# Altium PCB 102711_C0.PcbDoc
Units mil, origin at the board's own origin, x right, y up, seen from the top; angles counter-clockwise.
Board outline 3500.99 x 3320.09 mil, 2 copper layers (Top Layer, Bottom Layer); 22 components, 28 nets, 89 pads, 31 vias.
Unrouted connection lines stored in the file: 12.
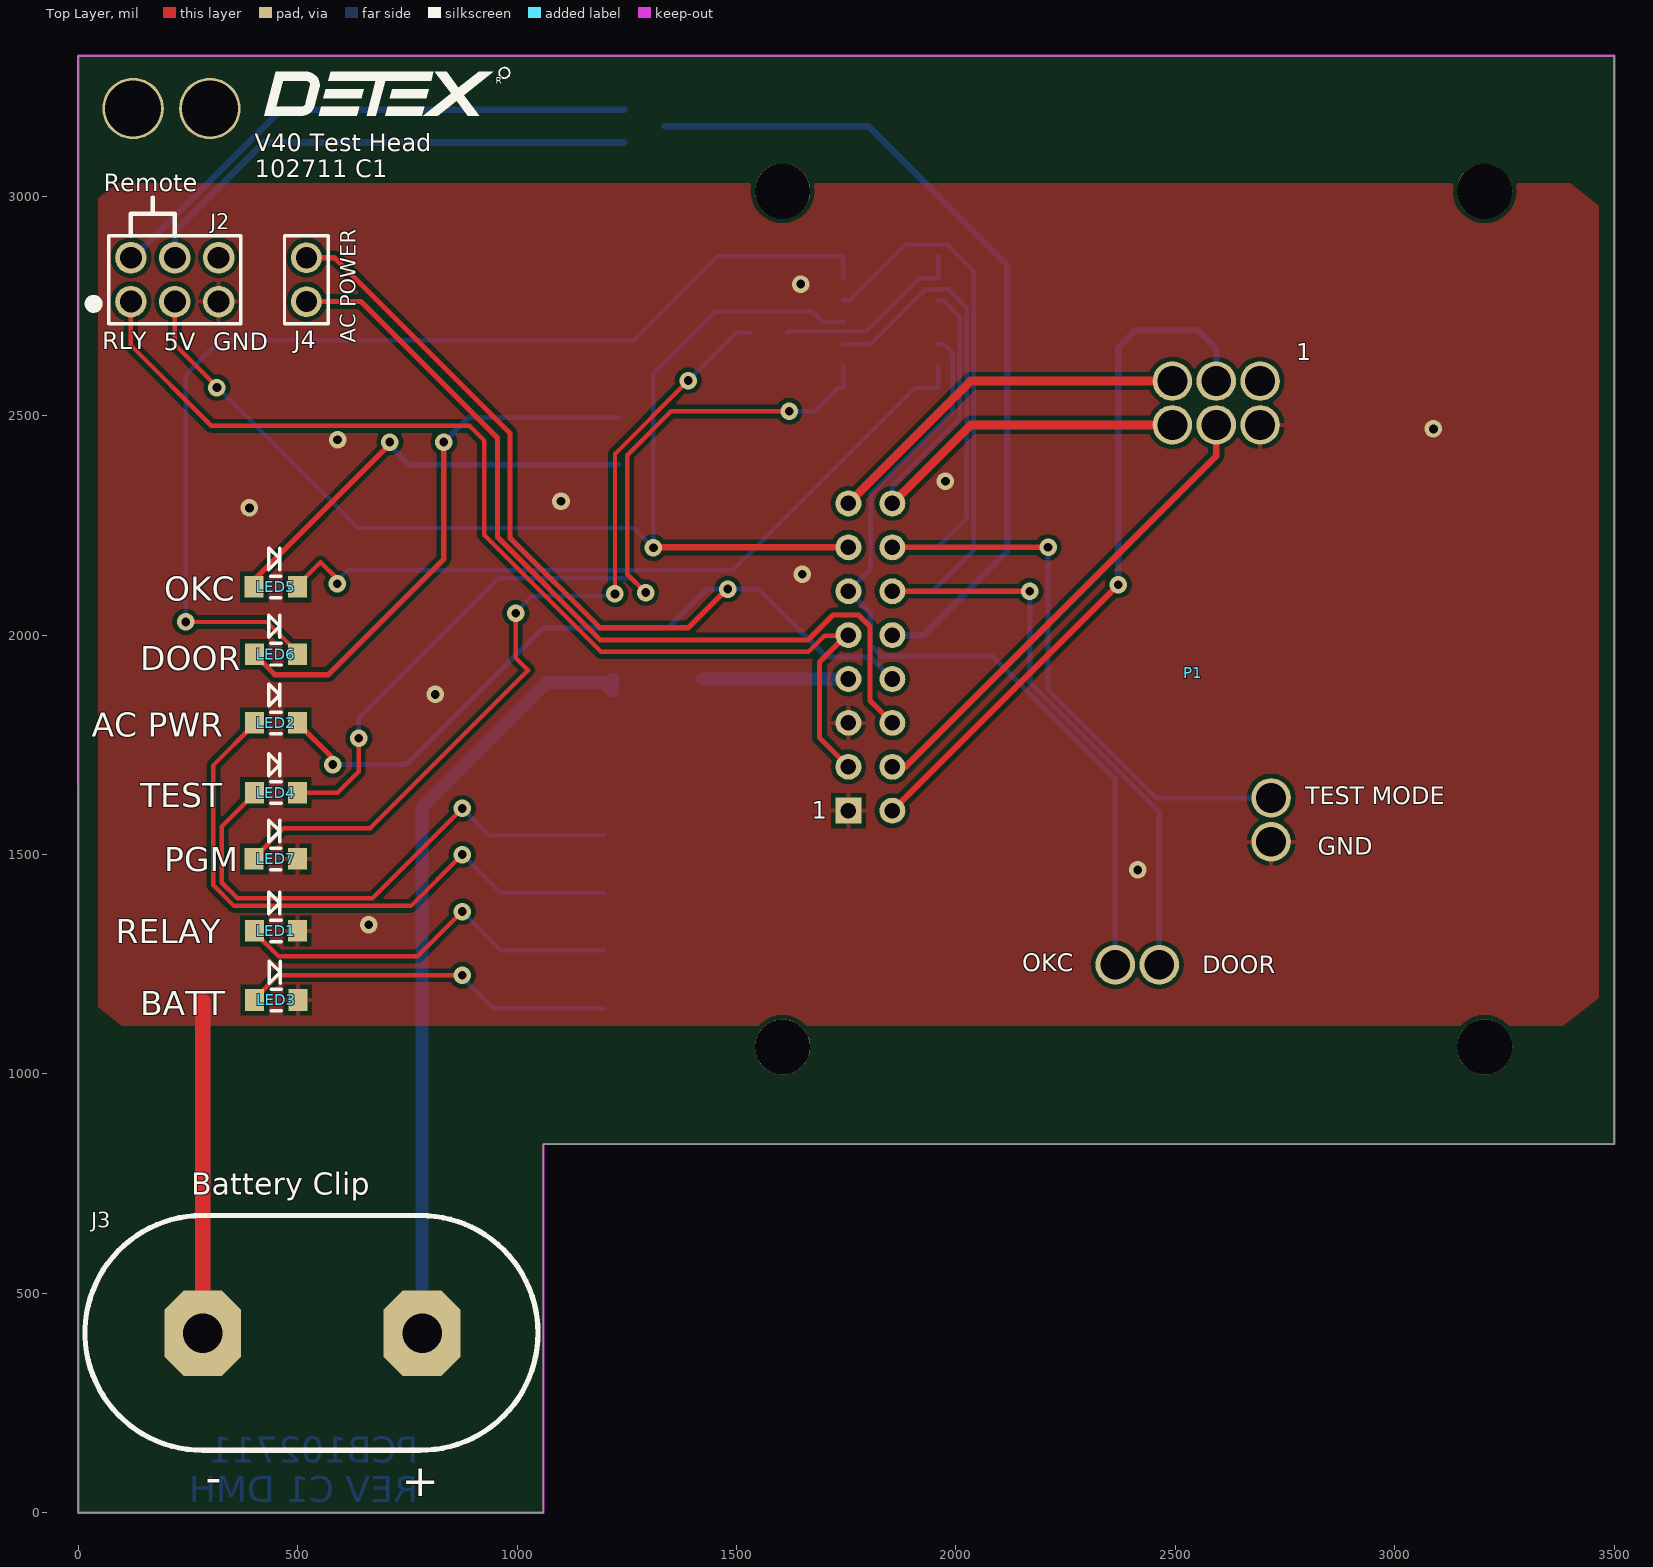
[diagram p0: Top Layer view]
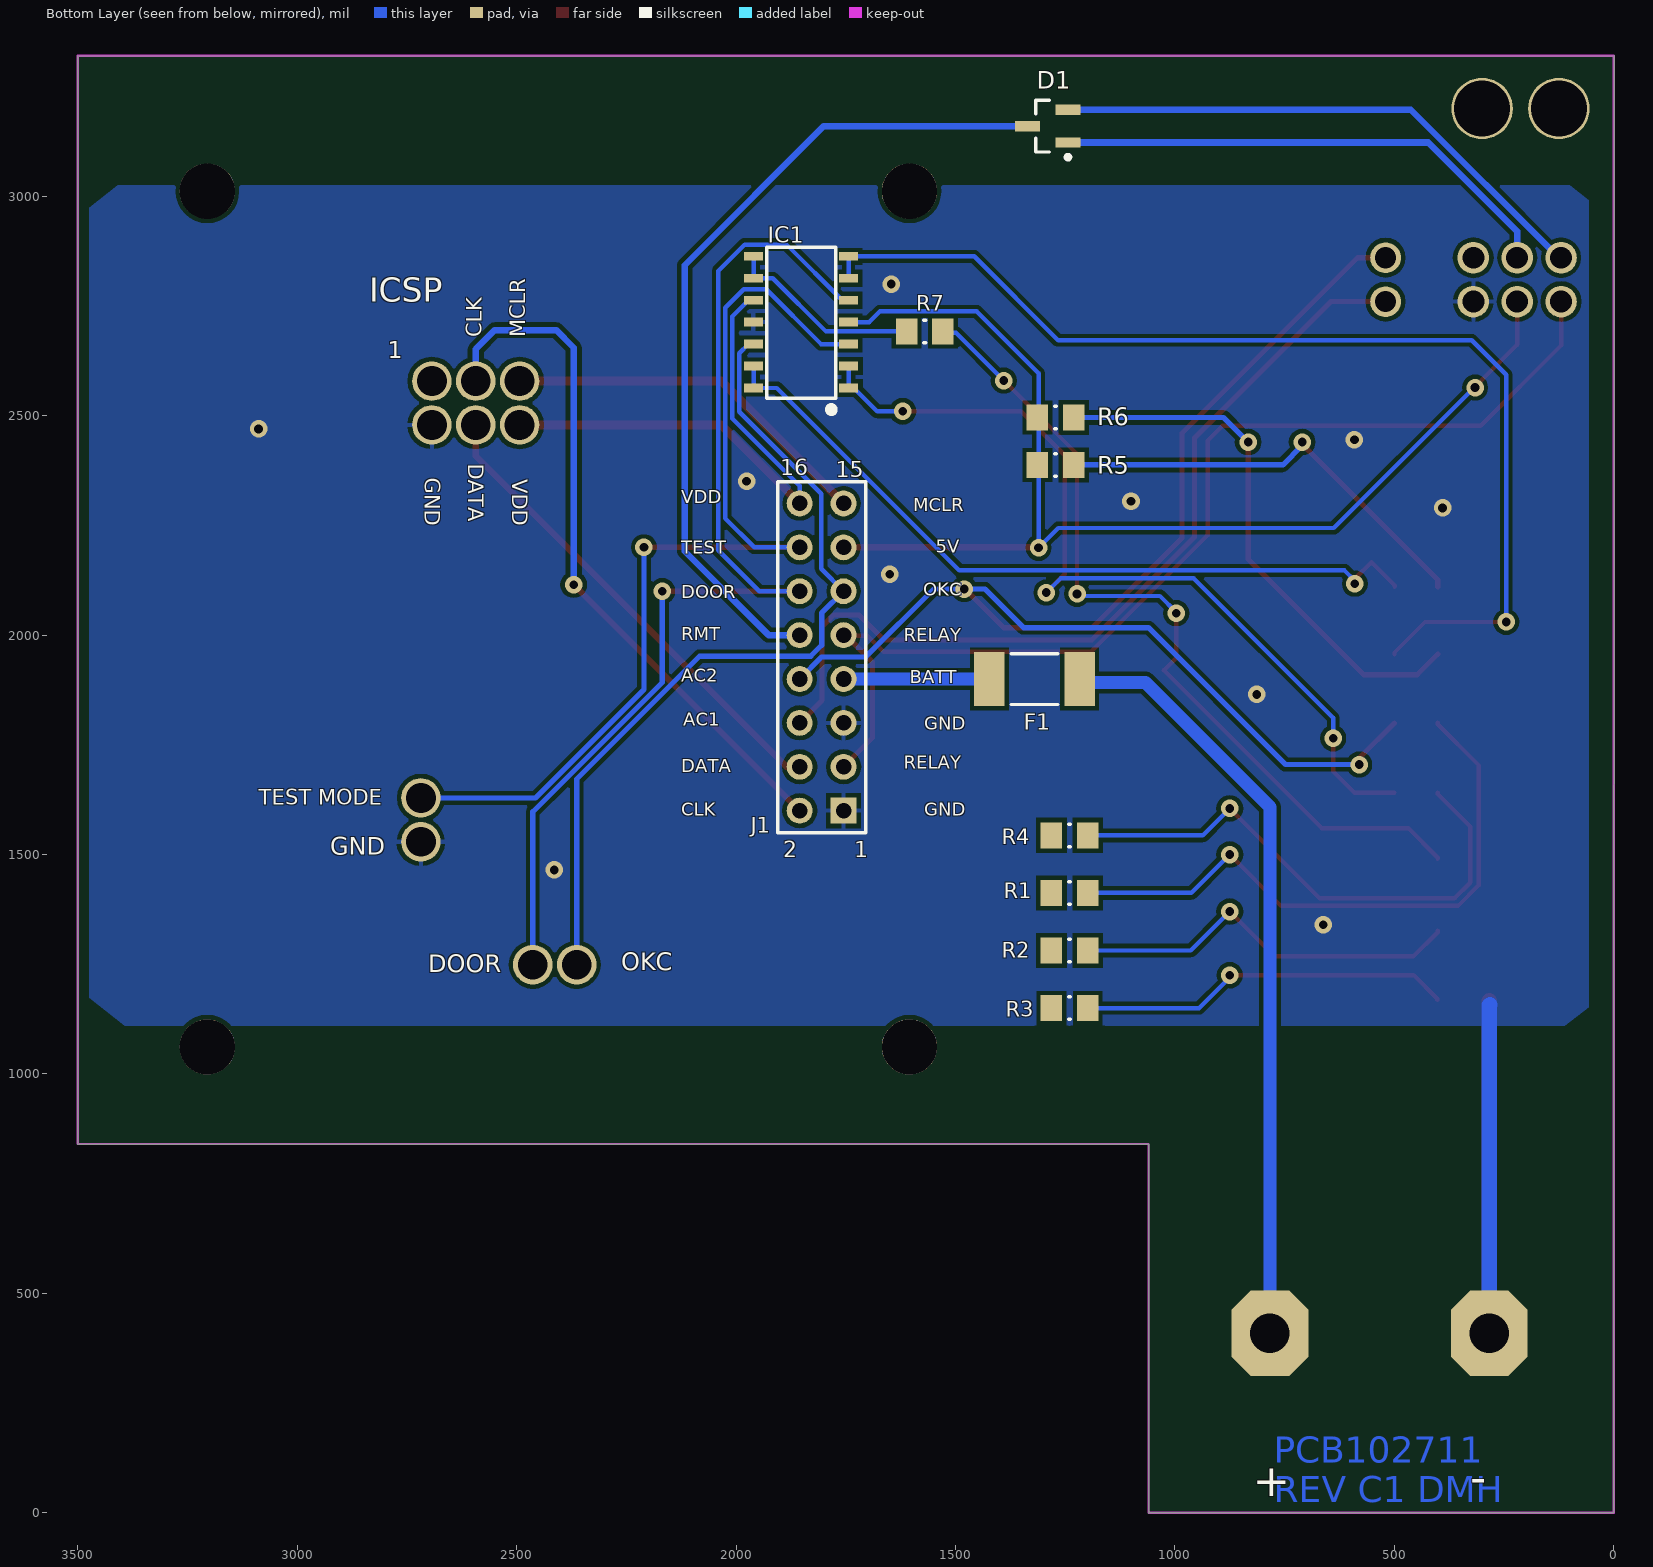
[diagram p1: Bottom Layer view, seen from below]

## Layer stack, top to bottom
Top Solder: solder mask 0.4, Solder Resist, Dk 3.5
Top Layer: signal copper 1.4
Dielectric1: dielectric 12.6, FR-4, Dk 4.8
Bottom Layer: signal copper 1.4
Bottom Solder: solder mask 0.4, Solder Resist, Dk 3.5

## Board outline
0,0 -0.99,3319.44 3500,3320.09 3500,840.16 1059.84,840.16 1059.84,0

## Design rules (kind name [scope] priority, off if disabled: settings)
Clearance Clearance_1 [InPolygon vs (InComponent('ICSP') OR InComponent('OKC_PAD') OR InComponent('TEST'))] p1: gap=20 ignorepadtopadclearanceinfootprint=FALSE except(0: Arc-Hole Track-Hole SMDPad-Hole THPad-Hole Via-Hole Fill-Hole Poly-Hole Region-Hole Text-Hole)
Clearance "Poly Clearance" [InPolygon vs (InComponent('J3') OR InComponent('J4') OR InComponent('J5') OR InComponent('J6') OR InComponent('OKC_PAD') OR InComponent('TEST') OR InComponent('ICSP'))] p2 off: gap=20 ignorepadtopadclearanceinfootprint=FALSE except(0: Arc-Hole Track-Hole SMDPad-Hole THPad-Hole Via-Hole Fill-Hole Poly-Hole Region-Hole Text-Hole)
Clearance "Poly Clearance_1" [InPolygon] p3: gap=10 ignorepadtopadclearanceinfootprint=FALSE except(0: Arc-Hole Track-Hole SMDPad-Hole THPad-Hole Via-Hole Fill-Hole Poly-Hole Region-Hole Text-Hole)
Clearance [All] p4: gap=7 ignorepadtopadclearanceinfootprint=FALSE
HoleSize [All] p1: absolutevalues=TRUE maxlimit=200 minlimit=15 maxpercent=80.000 minpercent=20.000
MinimumSolderMaskSliver [All] p1 off: minsoldermaskwidth=6
PlaneClearance PlaneClearance_1 [(InNet('GND') AND IsTrack OR IsPolygon)] p1: clearance=0
PlaneClearance [All] p2: clearance=20
PolygonConnect PolygonConnect_1 [IsVia vs InNet('GND')] p1: connectstyle=Direct reliefconductorwidth=8 reliefentries=2 polygonreliefangle="90 Angle" airgapwidth=10
PolygonConnect [All] p2: connectstyle=Relief reliefconductorwidth=10 reliefentries=4 polygonreliefangle="90 Angle" airgapwidth=10
RoutingVias [All] p1: holewidth=28 width=50 viastyle="Through Hole" minholewidth=15 minwidth=30 maxholewidth=35 maxwidth=50
SilkToSilkClearance [All] p1: silktosilkclearance=6
SilkToSolderMaskClearance SilkscreenOverComponentPads [IsPad] p1: minsilkscreentomaskgap=10 clearancetoexposedcopper=TRUE
SolderMaskExpansion [All] p1: expansion=4
Width [All] p1: maxlimit=60 minlimit=8 preferedwidth=10
25 further rules are at their usual default settings.

## Classes and differential pairs
component class 102711: D1 F1 IC1 J1 J2 J3 J4 LED1 LED2 LED3 LED4 LED5 LED6 LED7 P1 R1 R2 R3 R4 R7

## Components (designator, comment, footprint, x,y, rotation, side; value= is the part's Value field where it differs from the comment)
D1 "BAS70-05" SOT-23_M 1290,3160 r0 bottom
F1 "1812L050PR" LFUS-1812L050_V 1320,1900 r0 bottom
IC1 "LM324F-GE2" SOIC14 1743.46,2563.19 r90 bottom
J1 "2x8 Header" HDR2X8 1755,1600 r90 bottom
J2 "2x3 MOLEX" HDR2X3 120,2760 r0 top
J3 "DC POWER" BAT_CONN 783.47,409.45 r0 top locked
J4 "AC POWER" HDR1X2 520,2760 r90 top
LED1 "RELAY" LTST-C170YKT_V 450.47,1326.06 r0 top
LED2 "AC PWR" LTST-C170YKT_V 450.47,1800 r0 top
LED3 "BATT" LTST-C170YKT_V 451.18,1168.58 r0 top
LED4 "TEST" LTST-C170YKT_V 450.47,1641.02 r0 top
LED5 "OKC" LTST-C170YKT_V 450,2110 r0 top
LED6 "DOOR" LTST-C170YKT_V 450.47,1956.5 r0 top
LED7 "PGM" LTST-C170YKT_V 450,1490 r0 top
P1 "V40 POGOS" V40_POGOS 2693.19,2578.98 r0 top locked
R1 "Res1" RESC0805(2012)_M 1240,1412.5 r180 bottom value=3.3K
R2 "Res1" RESC0805(2012)_M 1240,1281.25 r180 bottom value=1K
R3 "Res1" RESC0805(2012)_M 1240,1150 r0 bottom value=1.5K
R4 "Res1" RESC0805(2012)_M 1240,1543.75 r180 bottom value=1K
R5 "Res1" RESC0805(2012)_M 1272,2388 r180 bottom value=1K
R6 "Res1" RESC0805(2012)_M 1272,2496 r0 bottom value=1K
R7 "Res1" RESC0805(2012)_M 1570,2692.15 r180 bottom value=1K

## Footprints (in the part's own frame and the unit in brackets; to place one, negate y for a bottom-side part, rotate by r counter-clockwise, add the part's x,y. Pads: shape width x height; smd on the part's side, far side on the other; paste and mask are expansions set on the pad)
BAT_CONN [mil]
  oct 175x195 hole 90: 1(0,0) 2(-500,0)
  silkscreen extent -768,-267 264,268
HDR1X2 [mil] "Connector; Header; 2 Position"
  round 70 hole 48: 1(0,0) 2(100,0)
  silkscreen extent -50,-50 150,50
HDR2X3 [mil] "Connector; Header; 3x2 Position"
  round 72 hole 50: 1(0,0) 2(0,100) 3(100,0) 4(100,100) 5(200,0) 6(200,100)
  silkscreen extent -50,-50 250,150
HDR2X8 [mm] "Connector; Header; 8x2 Position"
  rect 1.5x1.5 hole 0.9: 1(0,0)
  round 1.5 hole 0.9: 2(0,2.54) 3(2.54,0) 4(2.54,2.54) 5(5.08,0) 6(5.08,2.54) 7(7.62,0) 8(7.62,2.54) 9(10.16,0) 10(10.16,2.54) 11(12.7,0) 12(12.7,2.54) 13(15.24,0) 14(15.24,2.54) 15(17.78,0) 16(17.78,2.54)
  silkscreen extent -1.27,-1.27 19.05,3.81
LFUS-1812L050_V [mm] "Chip Fuse, 2-Leads, Body 4.73x3.41mm"
  rect 1.78x3.15 smd: 1(-2.615,0) 2(2.615,0)
  silkscreen extent -1.35,-1.47 1.35,1.48, body extent -2.36,-1.7 2.36,1.7, height 0.75
LTST-C170YKT_V [mm] "SMD, 2-Leads, Body 2x1.25mm"
  rect 1.1x1.25 smd: 1(-1.25,0) 2(1.25,0)
  silkscreen extent -0.41,-0.63 0.3,2.25, body extent -1,-0.63 1,0.63, height 1.1
RESC0805(2012)_M [mm] "Chip Resistor, Body 2.0x1.3mm, IPC Low Density"
  rect 1.25x1.5 smd: 1(-1.05,0) 2(1.05,0)
  silkscreen extent -0.05,-0.65 0.05,0.65, body extent -1.1,-0.67 1.1,0.67, height 0.7
SOIC14 [mm]
  rect 0.51x1.1 smd: 1(0,0) 2(1.27,0) 3(2.54,0) 4(3.81,0) 5(5.08,0) 6(6.35,0) 7(7.62,0) 8(7.62,5.5) 9(6.35,5.5) 10(5.08,5.5) 11(3.81,5.5) 12(2.54,5.5) 13(1.27,5.5) 14(0,5.5)
  silkscreen extent -1.3,0.75 8.15,4.75, body extent -0.5,-0.29 8.1,5.79, height 1.65
SOT-23_M [mm] "SOT23, 3-Leads, Body 2.9x1.3mm, Pitch 0.95mm, Lead Span 2.5mm, IPC Low Density"
  rect 1.45x0.6 smd: 1(-1.175,0.95) 2(-1.175,-0.95) 3(1.175,0)
  silkscreen extent -1.3,-1.5 0.7,1.92, body extent -0.7,-1.5 0.7,1.5, height 1.1
V40_POGOS [mil]
  round 90 hole 68: 1(0,0) 2(0,-100) 3(-100,0) 4(-100,-100) 5(-200,0) 6(-200,-100) 7(25,-950) 8(25,-1050) 9(-230,-1330) 10(-330,-1330)

## Part data
D1: library part "D Schottky", "Dual Schottky Diode", MFR="DIODES, INC", ComponentLink1Description=Datasheet, ComponentLink1URL=http://www.mouser.com/ds/2/115/ds11007-768590.pdf, IFmax=70mA, MFR P/N=BAS70-05, PackageReference=SOT23
F1: library part CMP-1700-00002-1, "POLY-FUSE(R) Resettable PTC, 0.5 A, 0.15 to 1 Ohm Resistance, -40 to 85 degC, 1812 (4532 Metric), RoHS, Tape and Reel", Case\Package=0603, Case Code (Metric)=1608, Max Operating Temperature="155 degC", Min Operating Temperature="-55 degC", Package Quantity=1, Power Rating="100 mW", Resistance="150 kohm", Tolerance=1%, Voltage Rating="50 V", Case Code (Imperial)=0603, ComponentLink1Description="Manufacturer URL", ComponentLink1URL=http://www.littelfuse.com/, ComponentLink2Description=Datasheet, ComponentLink2URL=http://www.littelfuse.com/~/media/electronics/datasheets/resettable_ptcs/littelfuse_ptc_1812l_datasheet.pdf.pdf, DatasheetVersion=Feb-16, Height="0.45 mm", Length="1.6 mm", Mount="Surface Mount", PackageDescription="2-Pin Surface Mount Device, Body 4.55 x 3.24 mm", PackageReference=1812, Packaging="Tape and Reel", Pins=2, REACH SVHC="No SVHC", RoHSCompliant=true, Voltage Rating (DC)="50 V", Width="0.8 mm"
IC1: library part LM324F-GE2_1, "Quad Operational Amplifier 3-32V", ComponentLink1Description=Datasheet, ComponentLink1URL=https://www.mouser.com/ds/2/348/m358f-e-1265268.pdf
J1: library part "2x9 Header", DESC="8x2 HEADER"
J2: library part "Header 3X2", "Header, 3-Pin, Dual row", LatestRevisionDate=17-Jul-2002, LatestRevisionNote="Re-released for DXP Platform.", Publisher="Altium Limited"
J3 J4: library part "Header 2", "Header, 2-Pin", LatestRevisionDate=17-Jul-2002, LatestRevisionNote="Re-released for DXP Platform.", Publisher="Altium Limited"
LED1: library part CMP-1674-00007-1, "LED Uni-Color Green, 100 mW, 5 V, -55 to 85 degC, 2-Pin SMD, RoHS, Tape and Reel", ComponentLink1Description="Manufacturer URL", ComponentLink1URL=http://www.us.liteon.com/, ComponentLink2Description=Datasheet, ComponentLink2URL=http://datasheet.octopart.com/LTST-C190GKT-Lite-On-datasheet-158530.pdf, DatasheetVersion=Dec-06, PackageDescription="2-Pin Surface Mount Device, Body 1.6 x 0.8 mm", PackageReference=C190GKT
LED2 LED3: library part LED-ORANGE-AK-2
LED4: library part CMP-1674-00003-5, "LED Uni-Color Yellow, 60 mW, 80 mA, -55 to 85 degC, 2-Pin SMD, RoHS, Tape and Reel", Colour=Yellow, Manufacturer=Lite-On, Max Operating Temperature="85 degC", Min Operating Temperature="-55 degC", Package Quantity=3000, ComponentLink1Description="Manufacturer URL", ComponentLink1URL=http://www.us.liteon.com/, ComponentLink2Description=Datasheet, ComponentLink2URL="http://media.digikey.com/pdf/Data Sheets/Lite-On PDFs/LTST-C170YKT.pdf", DatasheetVersion=03/2000, DESC=TEST, Height="1.1 mm", Length="2 mm", Mount="Surface Mount", Mounting Technology="Surface Mount", PackageDescription="2-Pin Surface Mount Device, Body 2 x 1.25 mm", PackageReference=C170YKT, Packaging="Tape and Reel", Pins=2, RoHSCompliant=true
LED5 LED6 LED7: library part CMP-1674-00001-5, "LED Uni-Color Red, 100 mW, 200 mA, -55 to 85 degC, 2-Pin SMD, RoHS, Tape and Reel", Colour=Red, Manufacturer=Lite-On, Max Operating Temperature="85 degC", Min Operating Temperature="-55 degC", Package Quantity=3000, ComponentLink1Description="Manufacturer URL", ComponentLink1URL=http://www.us.liteon.com/, ComponentLink2Description=Datasheet, ComponentLink2URL=http://media.digikey.com/pdf/Data%20Sheets/Lite-On%20PDFs/LTST-C170CKT.pdf, DatasheetVersion=03/2003, Height="1.1 mm", Length="2 mm", Mount="Surface Mount", Mounting Technology="Surface Mount", PackageDescription="2-Pin Surface Mount Device, Body 2 x 1.25 mm", PackageReference=C170CKT, Packaging="Tape and Reel", Pins=2, RoHSCompliant=true
  LED5: DESC=OKC
  LED6: DESC=DOOR
  LED7: DESC=PGM
P1: library part V40_POGOS
R1 R2 R3 R4 R5 R6 R7: "Resistor", LatestRevisionDate=17-Jul-2002, LatestRevisionNote="Re-released for DXP Platform.", PackageDescription="Axial Device, Thru-Hole; 2 Leads; 0.3 in Pin Spacing", PackageReference=AXIAL-0.3, Published=8-Jun-2000, Publisher="Altium Limited"

## Free pads (board coordinates)
  round 140 hole 127: 0(125,3200) 0(300,3200)
  round 126 hole 126 unplated paste+0 mask+0: 0(1605,1061.66) 0(1605,3011.66) 0(3205,1061.66) 0(3205,3011.66)

## Via types
v1: diameter 40, hole 20, Top Layer to Bottom Layer, tented both sides, 30 vias
v2: diameter 40, hole 20, Top Layer to Bottom Layer, 1 vias

## Nets (pads, with @x,y where several pads share a name; then routed paths per layer and width w, separated by ;. In a path a pad name is that pad's centre, name@x,y a point inside that pad or via, vN(x,y) a via of type N, cw(c..) or ccw(c..) an arc to the next point about the centre after c; other vN are vias at no path point)
5V: IC1.4 J1.13 J2.3 R4.1 R5.1 R6.2 | length 2728.3
  Top Layer w10: J2.3 220,2662 316,2566 v1(316,2564)
  Top Layer w15: v1(1310.69,2199) 1311.69,2200 J1.13
  Bottom Layer w10: v1(316,2564) 316,2566 638,2244 1265.69,2244 v1(1310.69,2199) 1310.69,2596.69 1451.85,2737.85 1672.15,2737.85 1696.81,2713.19 IC1.4
AC1: J1.6 J4.1 R1.1 | length 2011
  Top Layer w12: J4.1 644,2760 955.12,2448.88 955.12,2223.33 1189.46,1989 1662.69,1989 1719.69,2046 1778,2046 1804,2020 1804,1851 J1.6
AC2: J1.8 J4.2 LED2.2 | length 3139.3
  Top Layer w12: LED2.2 580,1719.69 v1(580,1705) ; J4.2 584,2860 984,2460 984,2221.33 1188.33,2017 1390.59,2017 1478.59,2105 v1(1480,2105)
  Bottom Layer w12: v1(580,1705) 748.1,1705 1060.1,2017 1345.09,2017 1433.09,2105 v1(1480,2105) 1549.69,2105 1704.69,1950 1805,1950 J1.8
BATT: F1.1 J3.1 R3.2 | length 1785.1
  Bottom Layer w30: J3.1 783.47,1608.47 1067.23,1892.23 1197.85,1892.23 1217.05,1873.03 F1.1
CLK: J1.2 P1.3 | length 1598.8
  Top Layer w15: J1.2 v2(2370,2115)
  Bottom Layer w15: v2(2370,2115) 2370,2655 2410,2695 2550,2695 2593.19,2651.81 P1.3
DATA: J1.4 P1.4 | length 1102.3
  Top Layer w15: J1.4 1885,1700 2593.19,2408.19 P1.4
DOOR: IC1.5 J1.12 P1.9 | length 2521.7
  Top Layer w12: J1.12 v1(2168.31,2100)
  Bottom Layer w10: IC1.5 1758.19,2763.19 1885,2890 1980.44,2890 2040.65,2829.78 2040.65,2193.65 1947,2100 J1.12
  Bottom Layer w12: v1(2168.31,2100) 2168.31,1892.23 2463.19,1597.36 P1.9
GND: IC1.11 J1.1 J1.5 J2.5 J3.2 LED1.2 LED3.2 LED7.2 P1.2 P1.8 | length 1506.2
  Top Layer w35: J3.2 283.47,1166.53
  Bottom Layer w35: 282,1158 283.47,1156.53 J3.2
  other v1: 662,1340 2414.46,1465 813.46,1865 1650,2138.51 390,2290 1100,2305 1976,2350.85 591.02,2445 3088.19,2470 1646.2,2800
MCLR: J1.15 P1.5 | length 853.7
  Top Layer w20: J1.15 2033.98,2578.98 P1.5
NetD1_1: D1.1 J2.4 | length 1167.7
  Bottom Layer w15: J2.4 220,2920 422.6,3122.6 D1.1
NetD1_2: D1.2 J2.2 | length 1263.5
  Bottom Layer w15: J2.2 125,2860 462.4,3197.4 D1.2
NetF1_2: F1.2 J1.7 | length 332
  Bottom Layer w30: F1.2 J1.7
NetIC1_1: IC1.1 IC1.2 LED4.2 | length 2024
  Top Layer w10: LED4.2 591.02,1641.02 639.26,1689.26 v1@639.26,1772.22 ; v1(1293,2097) 1251,2139 1251,2410 1351,2510 v1(1620,2510)
  Bottom Layer w10: v1(639.26,1765) 639.26,1811.38 957.11,2129.23 1260.77,2129.23 v1(1293,2097) ; v1(1620,2510) 1678.66,2510 1731.85,2563.19 IC1.1 IC1.2
NetIC1_6: IC1.6 IC1.7 LED6.2 | length 2510.9
  Top Layer w10: v1(245,2030) 430,2030 499.69,1960.31 LED6.2
  Bottom Layer w10: v1(245,2030) 245,2593.2 323.74,2671.94 1266.25,2671.94 1457.5,2863.19 IC1.7 IC1.6
NetIC1_8: IC1.8 IC1.9 R7.1 | length 447.2
  Bottom Layer w10: R7.1@1614.35,2688.78 1617.72,2692.15 1795.13,2692.15 1916.17,2813.19 IC1.9 IC1.8
NetIC1_13: IC1.13 IC1.14 LED5.2 | length 1751.2
  Top Layer w10: LED5.2 499.21,2112.95 552.26,2166 590,2128.26 v1(590,2117.17)
  Bottom Layer w10: v1(590,2117.17) 590,2124 613.43,2147.43 1491.43,2147.43 1907.19,2563.19 IC1.14 IC1.13
NetLED1_1: LED1.1 R2.2 | length 902.2
  Top Layer w10: LED1.1 401.26,1323.11 456.37,1268 773,1268 v1(875,1370)
  Bottom Layer w10: v1(875,1370) 963.75,1281.25 R2.2
NetLED2_1: LED2.1 R1.2 | length 1403.5
  Top Layer w10: LED2.1 401.26,1797.05 308,1703.79 308,1430 355,1383 758,1383 v1(875,1500)
  Bottom Layer w10: v1(875,1500) 962.5,1412.5 R1.2
NetLED3_1: LED3.1 R3.1 | length 855.8
  Top Layer w10: LED3.1 401.97,1171.54 455.43,1225 v1(875,1225)
  Bottom Layer w10: v1(875,1225) 875,1220 945,1150 R3.1
NetLED4_1: LED4.1 R4.2 | length 1232.4
  Top Layer w10: LED4.1 401.26,1638.07 327,1563.81 327,1436 362.74,1400.26 670.26,1400.26 v1(875,1605)
  Bottom Layer w10: v1(875,1605) 936.25,1543.75 R4.2
NetLED5_1: LED5.1 R5.2 | length 1005
  Top Layer w12: LED5.1 400.79,2125.79 704.64,2429.64 704.64,2434.64 v1(710,2440)
  Bottom Layer w12: v1(710,2440) 710,2432 754,2388 R5.2
NetLED6_1: LED6.1 R6.1 | length 1247.7
  Top Layer w12: LED6.1 447.76,1910 570,1910 833.12,2173.12 v1(833.12,2440)
  Bottom Layer w12: v1(833.12,2440) 889.12,2496 R6.1
NetLED7_1: LED7.1 R7.2 | length 1942.8
  Top Layer w10: LED7.1 400.79,1492.95 467.83,1560 665,1560 1025,1920 997,1948 v1(997,2050) ; v1(1223,2094) 1223,2413 v1(1390,2580)
  Bottom Layer w10: v1(997,2050) 997,2052 1034.19,2089.19 1216.81,2089.19 1223,2083 v1(1223,2094) ; v1(1390,2580) 1498.78,2688.78 R7.2@1530,2688.78
OKC: IC1.12 J1.11 P1.10 | length 1933.2
  Bottom Layer w10: J1.11 1806,2151 1806,2322.24 1992.65,2508.89 1992.65,2642.15 1971.61,2663.19 IC1.12
  Bottom Layer w12: J1.11 1805,2050 1805,1977 1830,1952 2083.09,1952 2363.19,1671.9 P1.10
RELAY_COM: J1.3 J1.9 J2.1 R2.1 | length 2522.1
  Top Layer w10: J2.1 120,2660 303,2477 891.54,2477 925,2443.54 925,2228 1191,1962 1664,1962 1701,1999 1754,1999 J1.9
  Top Layer w12: J1.9@1752.79,2002.21 1689,1938.42 1689,1766 J1.3
RMT: D1.3 J1.10 | length 1905.2
  Bottom Layer w15: D1.3 1800,3160 2117,2843 2117,2191 1926,2000 J1.10
TEST: IC1.3 J1.14 P1.7 | length 2316.7
  Top Layer w12: J1.14 v1(2210,2200)
  Bottom Layer w10: IC1.3 1806.35,2663.19 1931.16,2788 1982.44,2788 2024.65,2745.78 2024.65,2265.91 1958.74,2200 J1.14
  Bottom Layer w12: v1(2210,2200) 2210,1876 2457.02,1628.98 P1.7
VDD: IC1.10 J1.16 P1.6 | length 1266.1
  Top Layer w20: J1.16 2033.98,2478.98 P1.6
  Bottom Layer w10: J1.16 1855,2340 2008.65,2493.65 2008.65,2726.15 1971.61,2763.19 IC1.10
pads on no net: J2.6 P1.1

## Polygon pours and split planes (outlines as drawn)
GND on Top Layer "GND_L01_P004" (solid, remove dead copper, pour order 4): 45,2995.94 88.43,3030 3399.86,3030 3465,2978.91 3465,1173.86 3383.57,1110 99.29,1110 45,1152.57
GND on Bottom Layer "Top Layer-No Net" (solid, remove dead copper, pour order 3): 57,2991.03 100.39,3025 3408.91,3025 3474,2974.05 3474,1173.69 3392.64,1110 111.24,1110 57,1152.46

## Keep-outs
Keep-Out Layer:
  lines w5: 0,0 0,3320.09 3500,3320.09 3500,840.16 1059.84,840.16 1059.84,0 0,0

## Other copper
Bottom Layer:
  text "PCB102711 / REV C1 DMH" at 775,24 h60

## Silkscreen, mask and mechanical layers (free items; w line width, h text height)
Top Overlay:
  circle w21: c35,2755 r10
  circle w4: c971.09,3281.25 r12
  region: 472.15,3284 445.15,3183.25 423.4,3183.25 450.4,3284
  region: 467.15,3284 518.9,3284 521.9,3283.75 524.4,3283.5 527.65,3282.75 530.4,3281.75 533.65,3280.25 536.4,3278.5 539.65,3276.25 542.15,3273.5 544.15,3271.25 546.4,3267.75 548.15,3263.75 549.4,3259.5 550.15,3255.25 549.9,3250.5 549.65,3247 538.15,3204.75 537.15,3202 535.65,3199.25 533.65,3195.75 531.15,3192.75 528.15,3190.25 525.65,3188.25 523.4,3186.75 520.65,3185.75 516.9,3184.25 512.65,3183.5 510.4,3183.25 443.65,3183.25 450.9,3204.25 509.9,3204.25 512.4,3204.75 513.4,3205.25 514.9,3206.25 516.15,3207.5 517.15,3208.75 518.15,3210.75 518.9,3213.25 529.15,3254.75 528.9,3256 528.4,3257 527.65,3258.25 526.15,3259.75 525.15,3261 522.4,3262.5 520.9,3263 518.9,3263.25 466.65,3263
  region: 553.65,3204.25 639.9,3204.25 634.15,3183.25 547.9,3183.25
  region: 564.4,3244 650.65,3244 644.9,3223 558.65,3223
  region: 715.9,3244 798.65,3244 793.15,3223 710.15,3223
  region: 705.15,3204.25 788.15,3204 782.4,3183 699.4,3183
  region: 839.15,3284 866.4,3247.25 912.4,3284 945.9,3284 878.65,3230.5 914.15,3183.25 887.9,3183.25 862.4,3217.5 819.4,3183.25 785.9,3183.25 849.9,3234.25 812.9,3284
  region: 809.4,3284 803.9,3263 699.4,3263 677.9,3183.25 657.15,3183.25 678.4,3263 569.4,3263 574.9,3284
  lines w10: 120,2910 120,2960 220,2960 220,2910 ; 170,2960 170,2997.35
  text "R" at 951.09,3251.25 h25
  text "V40 Test Head / 102711 C1" at 401.77,3043.12 h40
  text "Remote" at 58,3012 h40
  text "AC POWER" at 632.12,2666.42 h35 r90
  text "RLY" at 55,2651.19 h40
  text "5V" at 195,2649.19 h40
  text "GND" at 307.99,2649.19 h40
  text "1" at 1671,1582 h40
  text "GND" at 2825,1500 h40
Bottom Overlay:
  text "MCLR" at 2480,2679 h35 r270
  text "CLK" at 2580,2679 h35 r270
  text "DATA" at 2610,2390 h35 r90
  text "GND" at 2710,2359.17 h35 r90
  text "VDD" at 2510,2355.51 h35 r90
  text "VDD" at 2125,2300 h30
  text "MCLR" at 1596.72,2282 h30
  text "5V" at 1544.59,2188 h30
  text "TEST" at 2125,2186 h30
  text "OKC" at 1573.01,2090 h30
  text "DOOR" at 2125,2084 h30
  text "RMT" at 2125,1988 h30
  text "RELAY" at 1618.43,1986 h30
  text "AC2" at 2125,1894 h30
  text "BATT" at 1603.98,1890 h30
  text "AC1" at 2120,1794 h30
  text "GND" at 1571.59,1784 h30
  text "RELAY" at 1618.43,1696 h30
  text "DATA" at 2125,1688 h30
  text "GND" at 1571.59,1588 h30
  text "CLK" at 2125,1588 h30
  text "GND" at 2925,1500 h40
Mechanical 1:
  lines w5: 0,0 0,3320.09 3500,3320.09 3500,840.16 1059.84,840.16 1059.84,0 0,0
Drill Drawing:
  circle w10: c4620.93,3916.87 r54.8
  lines w10: 4566.13,2163.31 4593.53,2163.31 4620.93,2135.91 4648.33,2163.31 4675.72,2163.31 4648.33,2190.71 4675.72,2218.11 4648.33,2218.11 4620.93,2245.51 4593.53,2218.11 4566.13,2218.11 4593.53,2190.71 4566.13,2163.31 ; 4566.13,2382.5 4675.72,2382.5 4675.72,2492.1 4566.13,2492.1 4566.13,2382.5 ; 4566.13,2629.1 4675.72,2629.1 4675.72,2738.7 4566.13,2738.7 4566.13,2629.1 ; 4566.13,2875.69 4620.93,2903.09 4675.72,2875.69 4648.33,2930.49 4675.72,2985.29 4620.93,2957.89 4566.13,2985.29 4593.53,2930.49 4566.13,2875.69 ; 4566.13,3149.69 4593.53,3149.69 4593.53,3122.29 4648.33,3122.29 4648.33,3149.69 4675.72,3149.69 4675.72,3204.49 4648.33,3204.49 4648.33,3231.89 4593.53,3231.89 4593.53,3204.49 4566.13,3204.49 4566.13,3149.69 ; 4566.13,3478.48 4675.72,3478.48 4620.93,3368.88 4566.13,3478.48 ; 4566.13,3615.48 4566.13,3642.88 4593.53,3670.28 4566.13,3697.68 4566.13,3725.08 4593.53,3725.08 4620.93,3697.68 4648.33,3725.08 4675.72,3725.08 4675.72,3697.68 4648.33,3670.28 4675.72,3642.88 4675.72,3615.48 4648.33,3615.48 4620.93,3642.88 4593.53,3615.48 4566.13,3615.48 ; 4566.13,4218.27 4675.72,4218.27 4620.93,4108.67 4566.13,4218.27 ; 4588.05,2651.02 4653.81,2651.02 4653.81,2716.78 4588.05,2716.78 4588.05,2651.02 ; 4588.05,4196.35 4653.81,4196.35 4620.93,4130.59 4588.05,4196.35
  lines w15: 4469.84,2061.93 11126.47,2061.93 ; 4469.84,4281.29 11126.47,4281.29 ; 5354.86,1815.34 5354.86,4527.88 ; 6229.49,1815.34 6229.49,4527.88 ; 8106.63,1815.34 8106.63,4527.88 ; 8917.66,1815.34 8917.66,4527.88 ; 10103.4,1815.34 10103.4,4527.88 ; -0.99,3320 -0.06,0 1060,0 1060,840 1530,840 1777.49,840 3500,840 3500,3320 1200.97,3320 -0.99,3320 ; 4469.84,1815.34 11126.47,1815.34 11126.47,4527.88 4469.84,4527.88 4469.84,1815.34
  text "Symbol" at 4617.8,4355.27 h118.37
  text "Count" at 5428.84,4355.27 h118.37
  text "Hole Size" at 6303.47,4355.27 h118.37
  text "Plated" at 8180.6,4355.27 h118.37
  text "Hole Type" at 8991.64,4355.27 h118.37
  text "Via/Pad" at 10177.38,4355.27 h118.37
  text "2" at 5428.84,4108.67 h98.64
  text "48.00mil (1.219mm)" at 6303.47,4108.67 h98.64
  text "PTH" at 8180.6,4108.67 h98.64
  text "Round" at 8991.64,4108.67 h98.64
  text "Pad" at 10177.38,4108.67 h98.64
  text "2" at 5428.84,3862.07 h98.64
  text "90.00mil (2.286mm)" at 6303.47,3862.07 h98.64
  text "PTH" at 8180.6,3862.07 h98.64
  text "Round" at 8991.64,3862.07 h98.64
  text "Pad" at 10177.38,3862.07 h98.64
  text "2" at 5428.84,3615.48 h98.64
  text "126.00mil (3.200mm)" at 6303.47,3615.48 h98.64
  text "NPTH" at 8180.6,3615.48 h98.64
  text "Round" at 8991.64,3615.48 h98.64
  text "Pad" at 10177.38,3615.48 h98.64
  text "2" at 5428.84,3368.88 h98.64
  text "126.00mil (3.200mm)" at 6303.47,3368.88 h98.64
  text "NPTH" at 8180.6,3368.88 h98.64
  text "Round" at 8991.64,3368.88 h98.64
  text "Pad" at 10177.38,3368.88 h98.64
  text "2" at 5428.84,3122.29 h98.64
  text "127.00mil (3.226mm)" at 6303.47,3122.29 h98.64
  text "PTH" at 8180.6,3122.29 h98.64
  text "Round" at 8991.64,3122.29 h98.64
  text "Pad" at 10177.38,3122.29 h98.64
  text "6" at 5428.84,2875.69 h98.64
  text "50.00mil (1.270mm)" at 6303.47,2875.69 h98.64
  text "PTH" at 8180.6,2875.69 h98.64
  text "Round" at 8991.64,2875.69 h98.64
  text "Pad" at 10177.38,2875.69 h98.64
  text "10" at 5428.84,2629.1 h98.64
  text "68.00mil (1.727mm)" at 6303.47,2629.1 h98.64
  text "PTH" at 8180.6,2629.1 h98.64
  text "Round" at 8991.64,2629.1 h98.64
  text "Pad" at 10177.38,2629.1 h98.64
  text "16" at 5428.84,2382.5 h98.64
  text "35.43mil (0.900mm)" at 6303.47,2382.5 h98.64
  text "PTH" at 8180.6,2382.5 h98.64
  text "Round" at 8991.64,2382.5 h98.64
  text "Pad" at 10177.38,2382.5 h98.64
  text "31" at 5428.84,2135.91 h98.64
  text "20.00mil (0.508mm)" at 6303.47,2135.91 h98.64
  text "PTH" at 8180.6,2135.91 h98.64
  text "Round" at 8991.64,2135.91 h98.64
  text "Via" at 10177.38,2135.91 h98.64
  text "73 Total" at 5428.84,1889.31 h98.64
  text "Daniel Hahaj - (830) 629-2900 x4370 / Detex Corp / P/N 102711 / GREEN MASK/WHITE SILK, BOTH SIDES / TWO-SIDED COPPER / FR4 0.063\" / LEAD FREE - ROHS" at 4500,-75 h125

## Dimensions
3500,840 to 3500,3320 on Drill Drawing
-0.99,3320 to 3500,3320 on Drill Drawing
0,0 to -0.99,3320 on Drill Drawing
0,0 to 1060,0 on Drill Drawing

## Text inside footprints (layer, text, board x,y; h text height)
J1: Bottom Overlay "2" at 1893,1494 h37; Bottom Overlay "1" at 1731,1494 h37; Bottom Overlay "15" at 1773,2360 h37; Bottom Overlay "16" at 1899,2364 h37
J3: Top Overlay "+" at 822.47,100.45 h75 r180; Top Overlay "-" at 327.47,100.45 h75 r180; Top Overlay "Battery Clip" at 257.97,724.45 h50; Bottom Overlay "-" at 327.47,100.45 h75 r180; Bottom Overlay "+" at 822.47,100.45 h75 r180
P1: Top Overlay "TEST MODE" at 2796.19,1614.48 h40; Top Overlay "1" at 2775,2626 h39.37; Top Overlay "DOOR" at 2561.19,1229.48 h40; Top Overlay "OKC" at 2151.19,1234.16 h40; Bottom Overlay "1" at 2794.19,2631.29 h39.37; Bottom Overlay "TEST MODE" at 3088.19,1613.98 h35; Bottom Overlay "ICSP" at 2836,2759.48 h55; Bottom Overlay "OKC" at 2261.19,1236.83 h40; Bottom Overlay "DOOR" at 2701.19,1232.15 h40